# Altium PCB display.PcbDoc
Units mil, origin at the board's own origin, x right, y up, seen from the top; angles counter-clockwise.
Board outline 2930 x 2250 mil, 2 copper layers (Top Layer, Bottom Layer); 12 components, 19 nets, 65 pads, 18 vias.
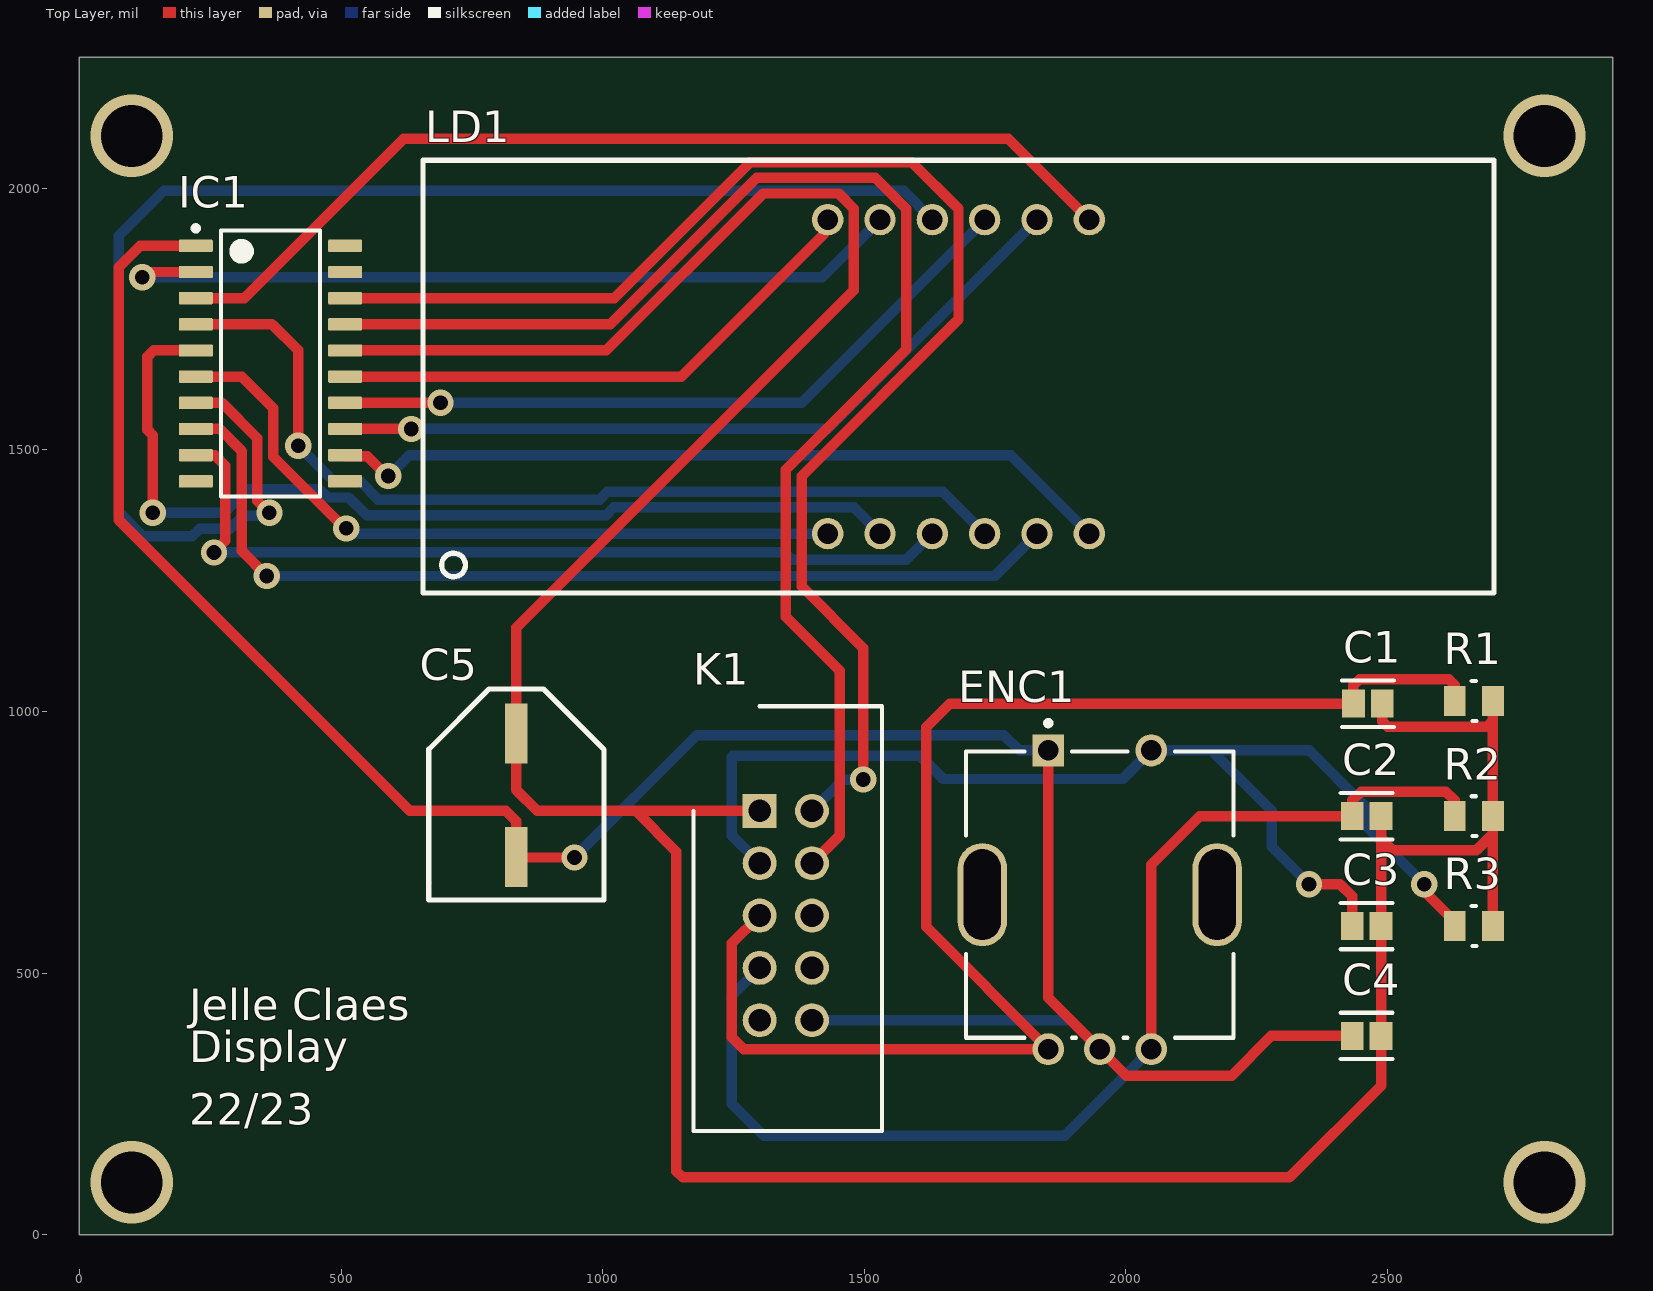
[diagram p0: Top Layer view]
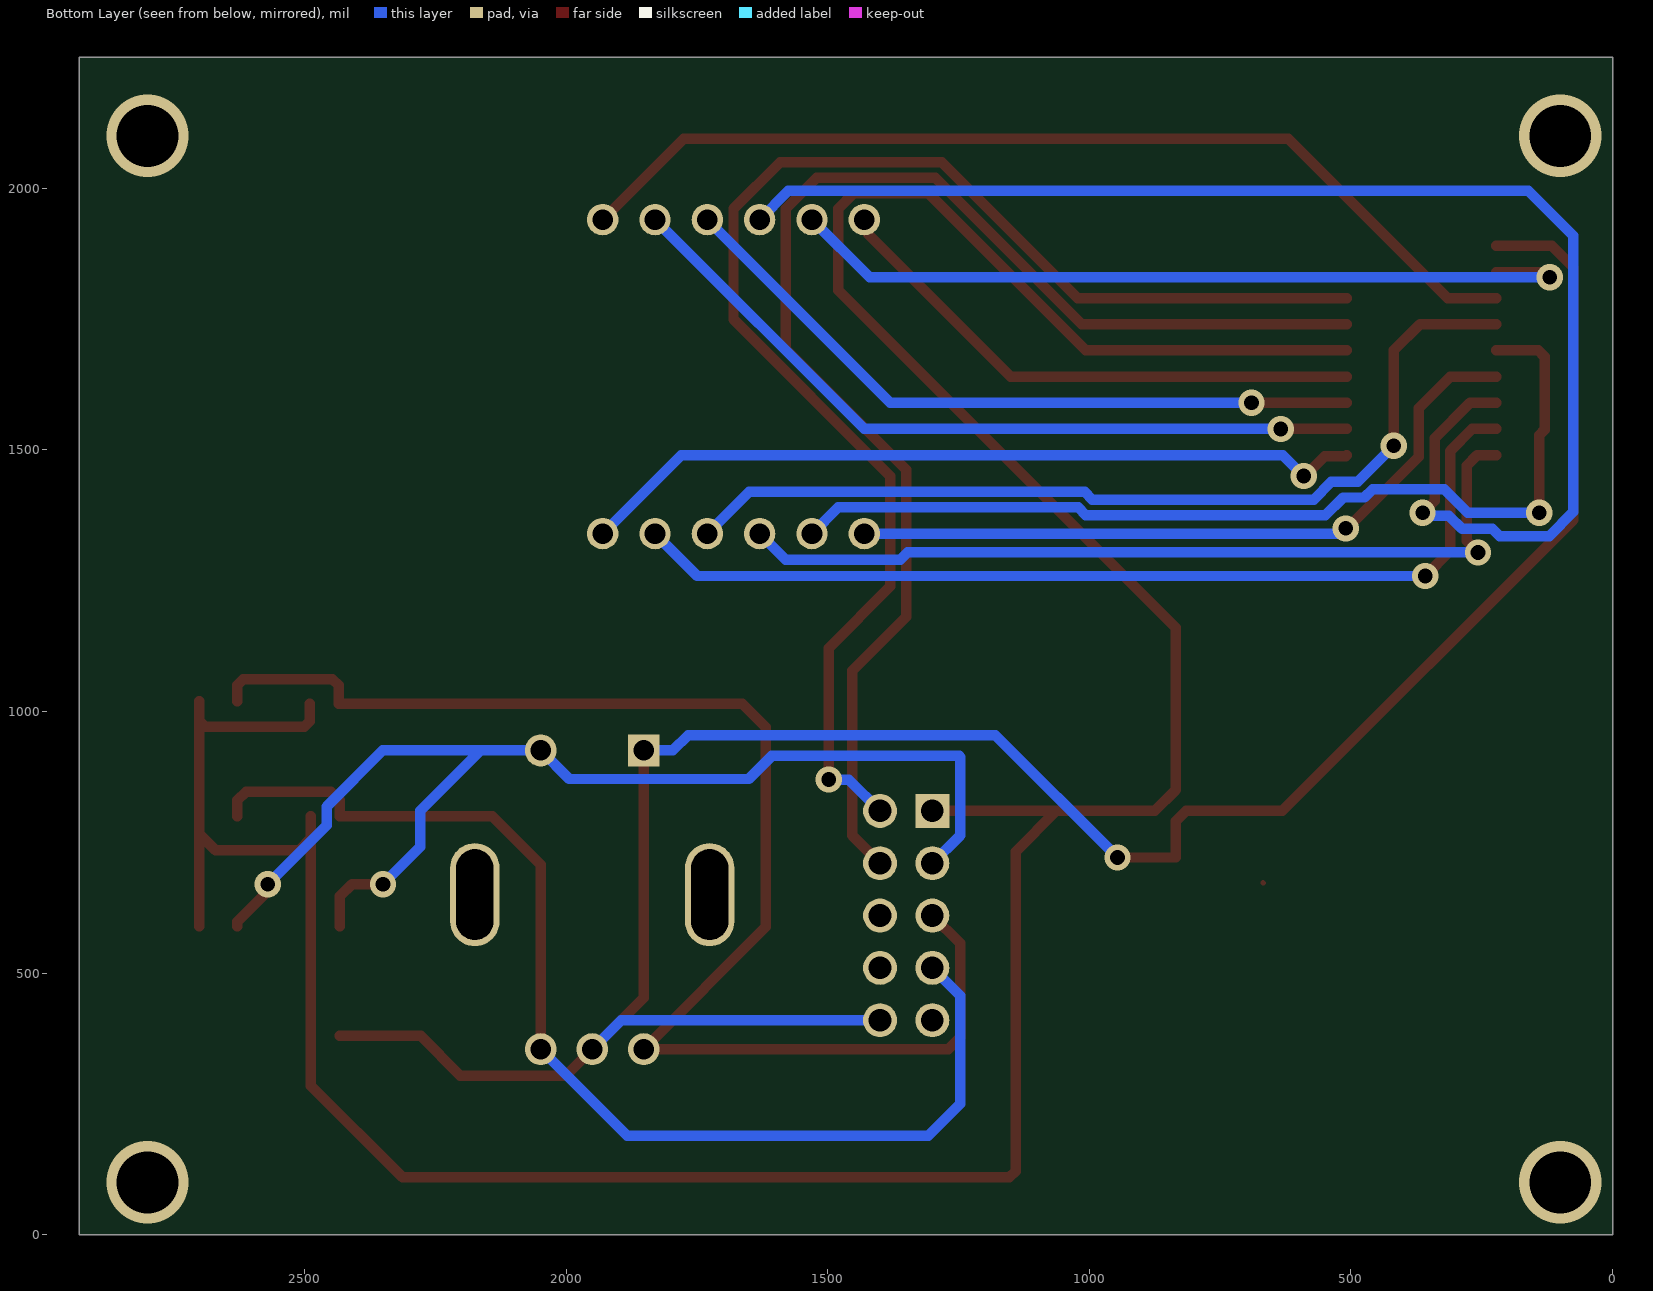
[diagram p1: Bottom Layer view, seen from below]
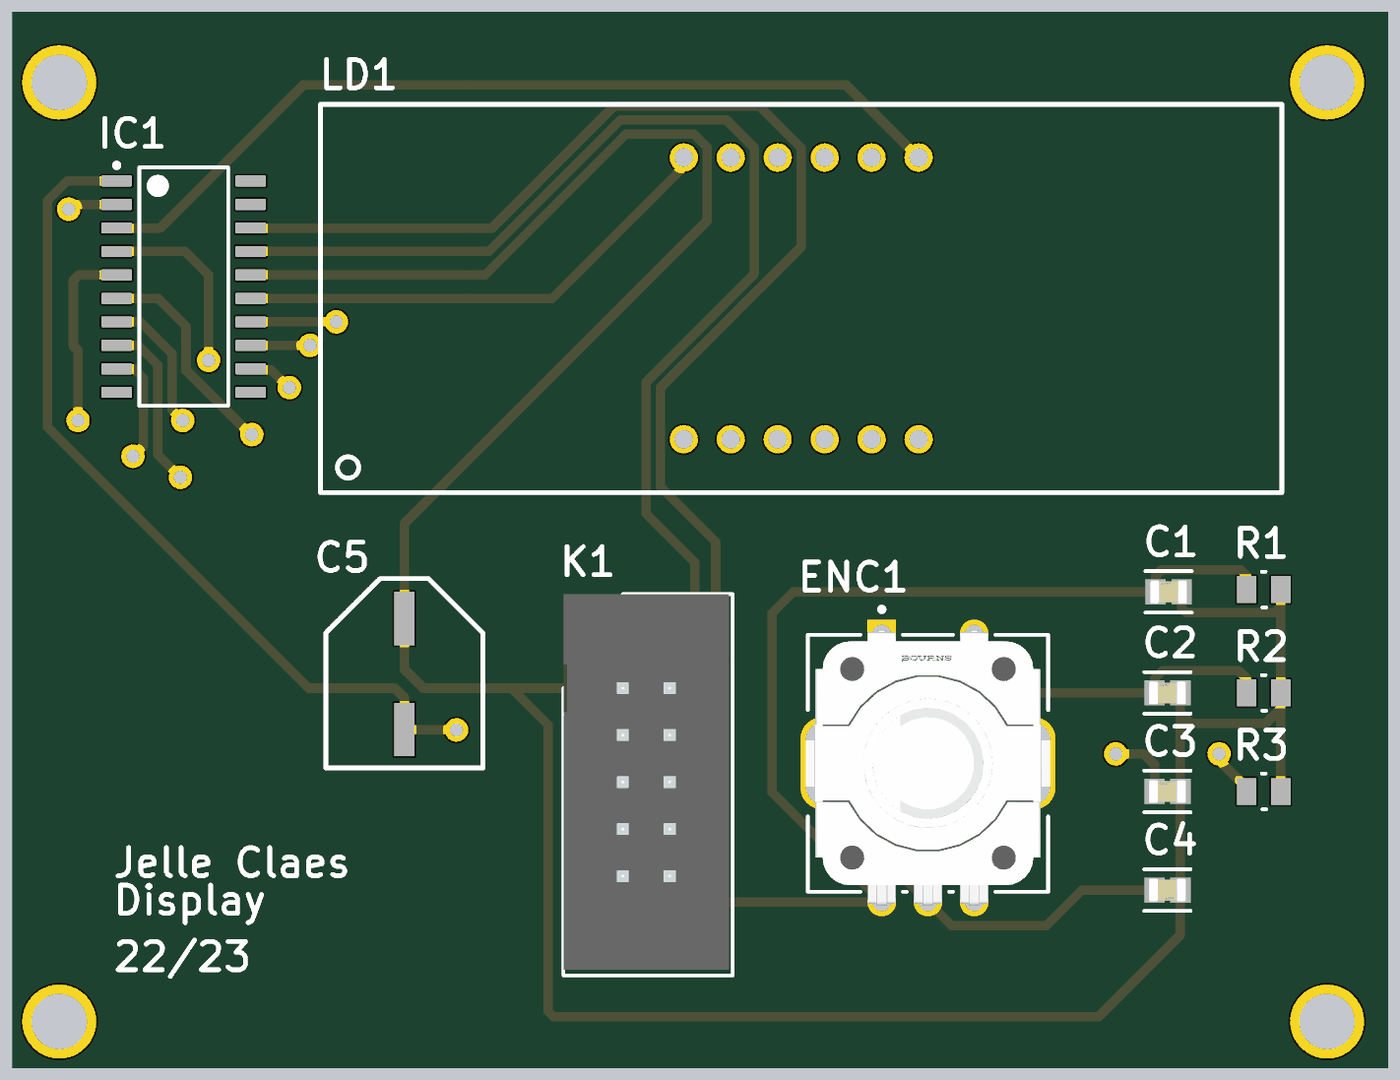
[diagram p2: 3D render of the assembled board from above, using the file's embedded part models]

## Layer stack, top to bottom
Top Solder: solder mask 0.4, Solder Resist, Dk 3.5
Top Layer: signal copper 1.4
Dielectric 1: dielectric 12.6, FR-4, Dk 4.8
Bottom Layer: signal copper 1.4
Bottom Solder: solder mask 0.4, Solder Resist, Dk 3.5

## Board outline
0,0 2930,0 2930,2250 0,2250

## Design rules (kind name [scope] priority, off if disabled: settings)
Clearance [All] p1: gap=10 ignorepadtopadclearanceinfootprint=FALSE except(0: Arc-Hole Track-Hole SMDPad-Hole THPad-Hole Via-Hole Fill-Hole Poly-Hole Region-Hole Text-Hole)
PolygonConnect [All] p1: connectstyle=Relief reliefconductorwidth=10 reliefentries=4 polygonreliefangle="90 Angle" airgapwidth=10
RoutingVias [All] p1: holewidth=28 width=50 viastyle="Through Hole" minholewidth=28 minwidth=50 maxholewidth=28 maxwidth=50
SolderMaskExpansion [All] p1: expansion=4 istentingtop=FALSE
Width [All] p1: maxlimit=100 minlimit=10 preferedwidth=20 minimp=50.000000 maximp=50.000000 favimp=50.000000
30 further rules are at their usual default settings.

## Components (designator, comment, footprint, x,y, rotation, side; value= is the part's Value field where it differs from the comment)
C1 "10nf" CC_0805_m 2462.41,1015 r0 top value="0.22 μF"
C2 "10nf" CC_0805_m 2460,800 r0 top value="0.22 μF"
C3 "10nf" CC_0805_m 2460,590 r0 top value="0.22 μF"
C4 "100nf" CC_0805_m 2460,380 r180 top value="0.22 μF"
C5 "100µf" CE_D8_L10 835,840 r90 top
ENC1 "PEC11R-4220F-S0012" PEC11R_4220F_S0012 1950,650 r0 top
IC1 "TM1637" SOP_20_M 365,1665 r0 top
K1 "5x2 box pinheader" "2x5 box pinheader" 1300,810 r270 top
LD1 "CA56-12SYKWA" LCD 1680,1640 r0 top
R1 "10K" R_0805_M 2665,1020 r0 top
R2 "10K" R_0805_M 2665,800 r0 top
R3 "10K" R_0805_M 2665,590 r0 top

## Footprints (in the part's own frame and the unit in brackets; to place one, negate y for a bottom-side part, rotate by r counter-clockwise, add the part's x,y. Pads: shape width x height; smd on the part's side, far side on the other; paste and mask are expansions set on the pad)
"2x5 box pinheader" [mm]
  rect 1.65x1.65 hole 1.1: 1(0,0)
  round 1.65 hole 1.1: 2(0,2.54) 3(2.54,0) 4(2.54,2.54) 5(5.08,0) 6(5.08,2.54) 7(7.62,0) 8(7.62,2.54) 9(10.16,0) 10(10.16,2.54)
  silkscreen extent -5.08,-3.21 15.54,5.95, body extent -5.08,-3.2 15.24,5.74, height 9.15
CC_0805_m [mil]
  rect 43.49x53.39 smd paste+0 mask+0: 1(-27.59,0) 2(27.59,0)
  silkscreen extent -49,-44 49,44, body extent -53,-32 53,32, height 10
CE_D8_L10 [mm]
  rect 2.9x1.1 smd: 1(-3,0) 2(3,0)
  Top Layer lines w0.254: -4.259,4.25 -4.25,4.241
  silkscreen extent -5.08,-4.25 5.16,4.25
LCD [mil]
  round 60 hole 39.37: 1(-250,-300) 2(-150,-300) 3(-50,-300) 4(50,-300) 5(150,-300) 6(250,-300) 7(250,300) 8(150,300) 9(50,300) 10(-50,300) 11(-150,300) 12(-250,300)
  silkscreen extent -1024,-413 1024,413
PEC11R_4220F_S0012 [mm]
  rect 1.55x1.55 hole 1 paste-1000 mask+0: 1(-2.5,7)
  round 1.55 hole 1 paste-1000 mask+0: 2(2.5,7) A(-2.5,-7.5) B(2.5,-7.5) C(0,-7.5)
  rrect100% 2.4x5 hole 4.4 slot 1.8 at 0 deg paste-1000 mask+0: 3(-5.7,0) 4(5.7,0)
  silkscreen extent -6.5,-6.95 6.5,8.45, body extent -7,-8.37 7,7.88, height 0.25
R_0805_M [mm] "Chip Resistor, 2-Leads, Body 2.00x1.25mm, IPC Medium Density"
  rect 1.05x1.45 smd: 1(-0.925,0) 2(0.925,0)
  silkscreen extent -0.1,-0.97 0.13,0.97, body extent -1.1,-0.72 1.1,0.72, height 0.5
SOP_20_M [mm] "SOIC,20-Leads,Body 12.9x5.6mm,Pitch 1.27mm,IPC Medium Density"
  rrect17% 1.65x0.6 smd: 1(-3.625,5.715) 2(-3.625,4.445) 3(-3.625,3.175) 4(-3.625,1.905) 5(-3.625,0.635) 6(-3.625,-0.635) 7(-3.625,-1.905) 8(-3.625,-3.175) 9(-3.625,-4.445) 10(-3.625,-5.715) 11(3.625,-5.715) 12(3.625,-4.445) 13(3.625,-3.175) 14(3.625,-1.905) 15(3.625,-0.635) 16(3.625,0.635) 17(3.625,1.905) 18(3.625,3.175) 19(3.625,4.445) 20(3.625,5.715)
  silkscreen extent -3.75,-6.45 2.4,6.69, body extent -2.8,-6.45 2.8,6.45, height 2

## Part data
C1 C2 C3 C4: library part Capacitor_Ceramic, Capacitance="0.22 μF", Manufacturer=KEMET, Manufacturer Part Number=C0805C224K5RACTU, Package=C0805C-DN, Temperature="-55°C to +125°C", Temperature Characteristic=X7R, Temperature Coefficient=30ppm/°C, Temperature Range High=+125°C, Temperature Range Low=-55°C, Tolerance=0.1, Voltage Rating="50 V", Automotive=No, Category=Cap, ComponentLink2Description=Datasheet, ComponentLink2URL=https://content.kemet.com/datasheets/KEM_C1003_C0G_SMD.pdf, Device Class L1="Passive Components", Device Class L2=Capacitors, Device Class L3="Ceramic Capacitors", Digikey Description="CAP CER 0.22UF 50V X7R 0805", Height=0.88mm, Ipc Land Pattern Name=CAPC200125X78, Lead Free=Yes, Material=Ceramic, Mouser Description="CAP CER 0.22UF 50V X7R 0805", Octopart=https://octopart.com/c0805c224k5ractu-kemet-144670, RoHS=TRUE
C5: library part Capacitor_Electrolytic, Manufacturer=Panasonic, Max Operating Temperature="105 degC", Min Operating Temperature="-55 degC", Package Quantity=500, Voltage Rating="25 V", ComponentLink1Description="Manufacturer URL", ComponentLink1URL=http://www.panasonic.com/, ComponentLink2Description=Datasheet, ComponentLink2URL=http://industrial.panasonic.com/cdbs/www-data/pdf/RDE0000/ABA0000C1181.pdf, DatasheetVersion=03/2016, Height="10.2 mm", Lead Pitch="3.1 mm", Length="10.2 mm", Mount="Surface Mount", Mounting Technology="Surface Mount", PackageDescription="2-Pin Electrolytic Aluminum Capacitor, Body 8.3 x 8.3 mm", PackageReference=EEE-FK1E221P, Packaging="Tape and Reel", Pins=2, REACH SVHC="No SVHC", RoHSCompliant=true
ENC1: "ROTARY ENCODER MECHANICAL 12PPR", Max Operating Temperature=70°C, Min Operating Temperature=-30°C, Package Quantity=150, Built in Switch=Yes, Detent=Yes, Encoder Type=Mechanical, Height=13.4mm, Hole Diameter=7mm, Length=26.5mm, Mount="Through Hole", Number of Channels=2, Number of Pins=5, Orientation=Vertical, Output Type=Quadrature, Packaging=Bulk, Pulses per Revolution=12, Radiation Hardening=No, REACH SVHC="No SVHC", RoHS Compliant=Yes, Series=PEC11R, Termination="PC Pin", Type=Mechanical, Width=12.5mm
IC1: "LED Drive Control Special Circuit", Package=Package, Availability="Not in stock", Check_prices=https://www.snapeda.com/parts/TM1637/Titan+Micro+Electronics/view-part/?ref=eda, MF="Titan Micro Electronics", MP=TM1637, Price=None, SnapEDA_Link=https://www.snapeda.com/parts/TM1637/Titan+Micro+Electronics/view-part/?ref=snap
K1: "Connector", Arrow Part Number=T821110A1S100CEU, Manufacturer_Name=Amphenol, Mouser Part Number=N/A, Arrow Price/Stock=https://www.arrow.com/en/products/t821110a1s100ceu/amphenol-fci?region=europe, Datasheet Link=https://docs.rs-online.com/e09c/0900766b81359cba.pdf, Height=9.15mm, Manufacturer_Part_Number=T821110A1S100CEU, Mouser Price/Stock=https://www.mouser.co.uk/ProductDetail/Amphenol/T821110A1S100CEU?qs=3IN%252Br8p6BrNf%2FuKCWm44Bg%3D%3D
R1 R2 R3: library part Resistor, Manufacturer="Vishay Dale", Part Number=CRCW08050000Z0EA

## Via types
v1: diameter 50, hole 28, Top Layer to Bottom Layer, 14 vias
v2: diameter 157.48, hole 118.11, Top Layer to Bottom Layer, 4 vias

## Nets (pads, with @x,y where several pads share a name; then routed paths per layer and width w, separated by ;. In a path a pad name is that pad's centre, name@x,y a point inside that pad or via, vN(x,y) a via of type N, cw(c..) or ccw(c..) an arc to the next point about the centre after c; other vN are vias at no path point)
+5: C1.2 C2.2 C3.2 C4.1 C5.2 IC1.16 K1.1 R1.2 R2.2 R3.2 | length 6548.1
  Top Layer w20: IC1.16 1007.13,1690 1307.13,1990 1450.71,1990 1480,1960.71 1480,1805.45 835,1160.45 C5.2 835,850 875,810 1063,810 ; K1.1 1063,810 ; C2.2 2487.59,757.41 ; C1.2 2490,981 2500,971 2690,971 2701.42,982.42 ; R3.2 2701.42,766.42 ; R1.2 2701.42,982.42 ; 1063,810 1141,732 1141,121.72 1152.72,110 2312.59,110 2487.59,285 C4.1 C3.2 2487.59,757.41 ; 2487.59,757.41 2510,735 2670,735 2701.42,766.42 ; 2701.42,766.42 R2.2 2701.42,982.42
GND: C4.2 C5.1 ENC1.1 ENC1.C IC1.1 K1.10 | length 4559.8
  Top Layer w20: IC1.1 116.36,1890 75,1848.64 75,1366 631,810 815,810 835,790 C5.1 835,721 v1(946,721) ; ENC1.1 1851.57,453.15 ENC1.C 2000.72,304 2202,304 2278,380 C4.2
  Bottom Layer w20: v1(946,721) 1180,955 1766.59,955 1796,925.59 ENC1.1 ; K1.10 1894.72,410 ENC1.C
NetC1_1: C1.1 ENC1.A K1.5 R1.1 | length 2684.5
  Top Layer w20: K1.5 1247,557 1247,377.72 1270,354.72 ENC1.A 1618,588.3 1618,970 1663,1015 C1.1 2434.82,1050 2446.82,1062 2616.58,1062 2628.58,1050 R1.1
NetC2_1: C2.1 ENC1.B K1.7 R2.1 | length 2222.6
  Top Layer w20: ENC1.B 2048.43,707.43 2141,800 C2.1 2432.41,830 2449.41,847 2611.58,847 2628.58,830 R2.1
  Bottom Layer w20: K1.7 1247,457 1247,250 1308,189 1882.7,189 ENC1.B
NetC3_1: C3.1 ENC1.2 K1.3 R3.1 | length 2302.2
  Top Layer w20: v1(2350,670) 2409.11,670 2432.41,646.7 C3.1 ; v1(2570,670) 2575.74,664.26 2575.74,650.72 2628.58,597.87 R3.1
  Bottom Layer w20: K1.3 1247,763 1247,913 1249,915 1607,915 1651,871 1993.84,871 ENC1.2 2163.41,925.59 ; v1(2350,670) 2278.83,741.17 2278.83,810.17 2163.41,925.59 ; v1(2570,670) 2457.13,782.87 2457.13,818.46 2349.99,925.59 2163.41,925.59
NetIC1_2: IC1.2 LD1.11 | length 1562
  Top Layer w20: v1(120,1830) 128.12,1830 138.12,1840 IC1.2
  Bottom Layer w20: v1(120,1830) 1420,1830 LD1.11
NetIC1_3: IC1.3 LD1.7 | length 1898.3
  Top Layer w20: IC1.3 315,1790 620,2095 1775,2095 LD1.7
NetIC1_4: IC1.4 LD1.4 | length 1792.4
  Top Layer w20: IC1.4 368,1740 418,1690 v1(418,1508)
  Bottom Layer w20: v1(418,1508) 487,1439 537.36,1439 571.36,1405 994.13,1405 1009.13,1420 1650,1420 LD1.4
NetIC1_5: IC1.5 LD1.2 | length 1855.8
  Top Layer w20: v1(140,1380) 140,1528.2 130,1538.2 130,1678.28 141.72,1690 IC1.5
  Bottom Layer w20: v1(140,1380) 276.29,1380 321.29,1425 458.57,1425 474.57,1409 514.64,1409 548.64,1375 1006.55,1375 1021.55,1390 1480,1390 LD1.2
NetIC1_6: IC1.6 LD1.1 | length 1386.5
  Top Layer w20: IC1.6 310,1640 370,1580 370,1487 507,1350 v1(510,1350)
  Bottom Layer w20: v1(510,1350) 518.12,1350 528.12,1340 LD1.1
NetIC1_7: IC1.7 LD1.10 | length 2764.6
  Top Layer w20: IC1.7 272.44,1590 340,1522.44 340,1403 v1(363,1380)
  Bottom Layer w20: v1(363,1380) 357.26,1374.26 312.98,1374.26 287.72,1349 229.62,1349 215.62,1335 121.36,1335 75,1381.36 75,1909 161,1995 1575,1995 LD1.10
NetIC1_8: IC1.8 LD1.5 | length 1869.5
  Top Layer w20: IC1.8 267.88,1540 310,1497.88 310,1307 v1(358,1259)
  Bottom Layer w20: v1(358,1259) 1749,1259 LD1.5
NetIC1_9: IC1.9 LD1.3 | length 1639.6
  Top Layer w20: IC1.9 259,1490 279,1470 279,1326 v1(257,1304)
  Bottom Layer w20: v1(257,1304) 1347,1304 1361,1290 1580,1290 LD1.3
NetIC1_12: IC1.12 LD1.6 | length 1517.6
  Top Layer w20: IC1.12 509.53,1488.19 550.41,1488.19 588.6,1450 v1(590,1450)
  Bottom Layer w20: v1(590,1450) 630,1490 1780,1490 LD1.6
NetIC1_13: IC1.13 LD1.8 | length 1488
  Top Layer w20: IC1.13 v1(634,1540)
  Bottom Layer w20: v1(634,1540) 1430,1540 LD1.8
NetIC1_14: IC1.14 LD1.9 | length 1367.3
  Top Layer w20: IC1.14 v1(690,1590)
  Bottom Layer w20: v1(690,1590) 1380,1590 LD1.9
NetIC1_15: IC1.15 LD1.12 | length 1058.3
  Top Layer w20: IC1.15 1150,1640 1422.35,1912.35 1422.35,1932.35 LD1.12
NetIC1_17: IC1.17 K1.4 | length 2623.4
  Top Layer w20: IC1.17 1014.71,1740 1294.71,2020 1520.71,2020 1580,1960.71 1580,1692.28 1350,1462.28 1350,1181 1453,1078 1453,763 K1.4
NetIC1_18: IC1.18 K1.2 | length 2703.7
  Top Layer w20: IC1.18 1022.28,1790 1282.28,2050 1590.71,2050 1680,1960.71 1680,1749.86 1380,1449.86 1380,1239 1498,1121 v1(1498,870)
  Bottom Layer w20: K1.2 1460,870 v1(1498,870)
pads on no net: ENC1.3 ENC1.4 IC1.10 IC1.11 IC1.19 IC1.20 K1.6 K1.8 K1.9
copper on no net:
  other v2: 100,100 2800,100 100,2100 2800,2100

## Silkscreen, mask and mechanical layers (free items; w line width, h text height)
Top Overlay:
  text "Jelle Claes" at 210,410 h60
  text "Display" at 210,329.99 h60
  text "22/23" at 210,210 h60